# Altium PCB Battery_Mnitor1.PcbDoc
Units mil, origin at the board's own origin, x right, y up, seen from the top; angles counter-clockwise.
Board outline 1655 x 1765 mil, 2 copper layers (Top Layer, Bottom Layer); 22 components, 18 nets, 91 pads, 10 vias.
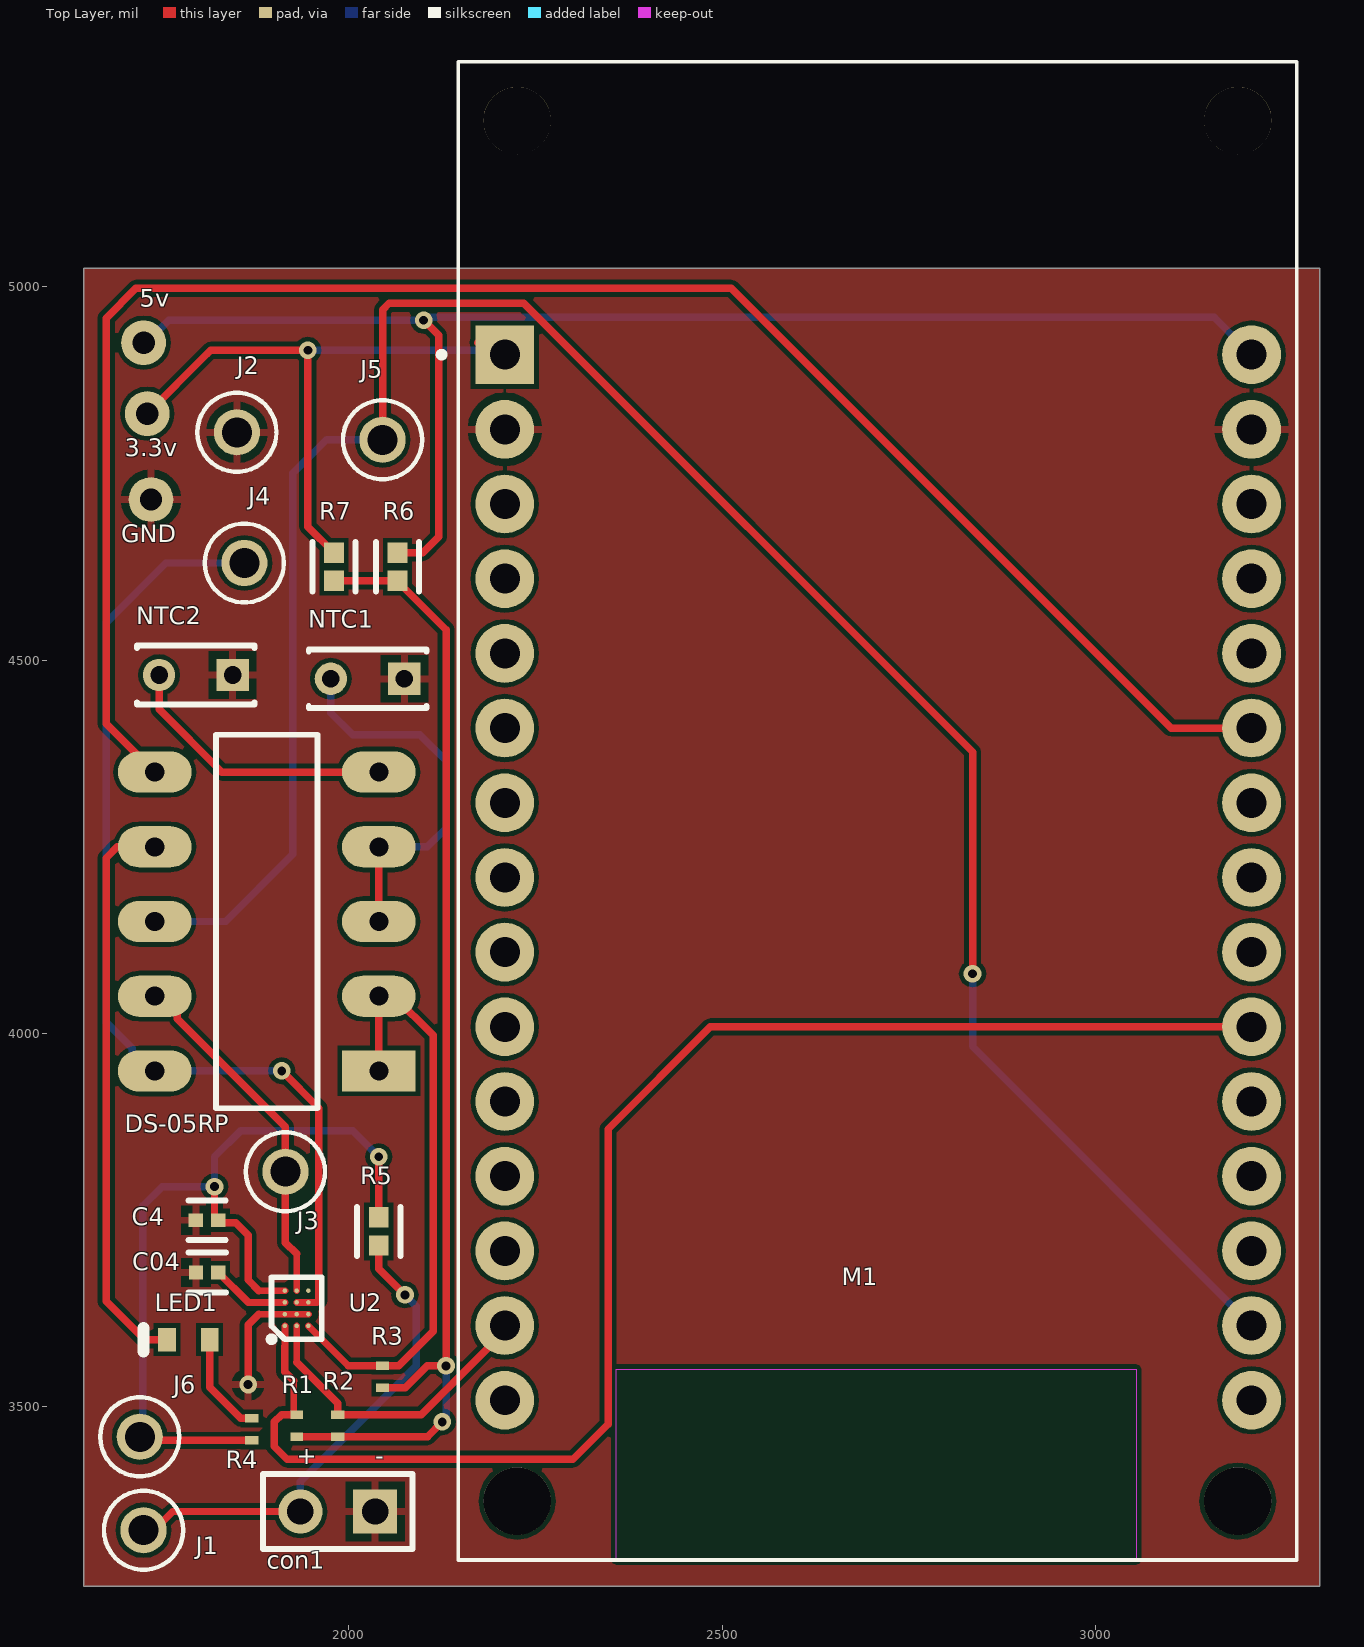
[diagram p0: Top Layer view]
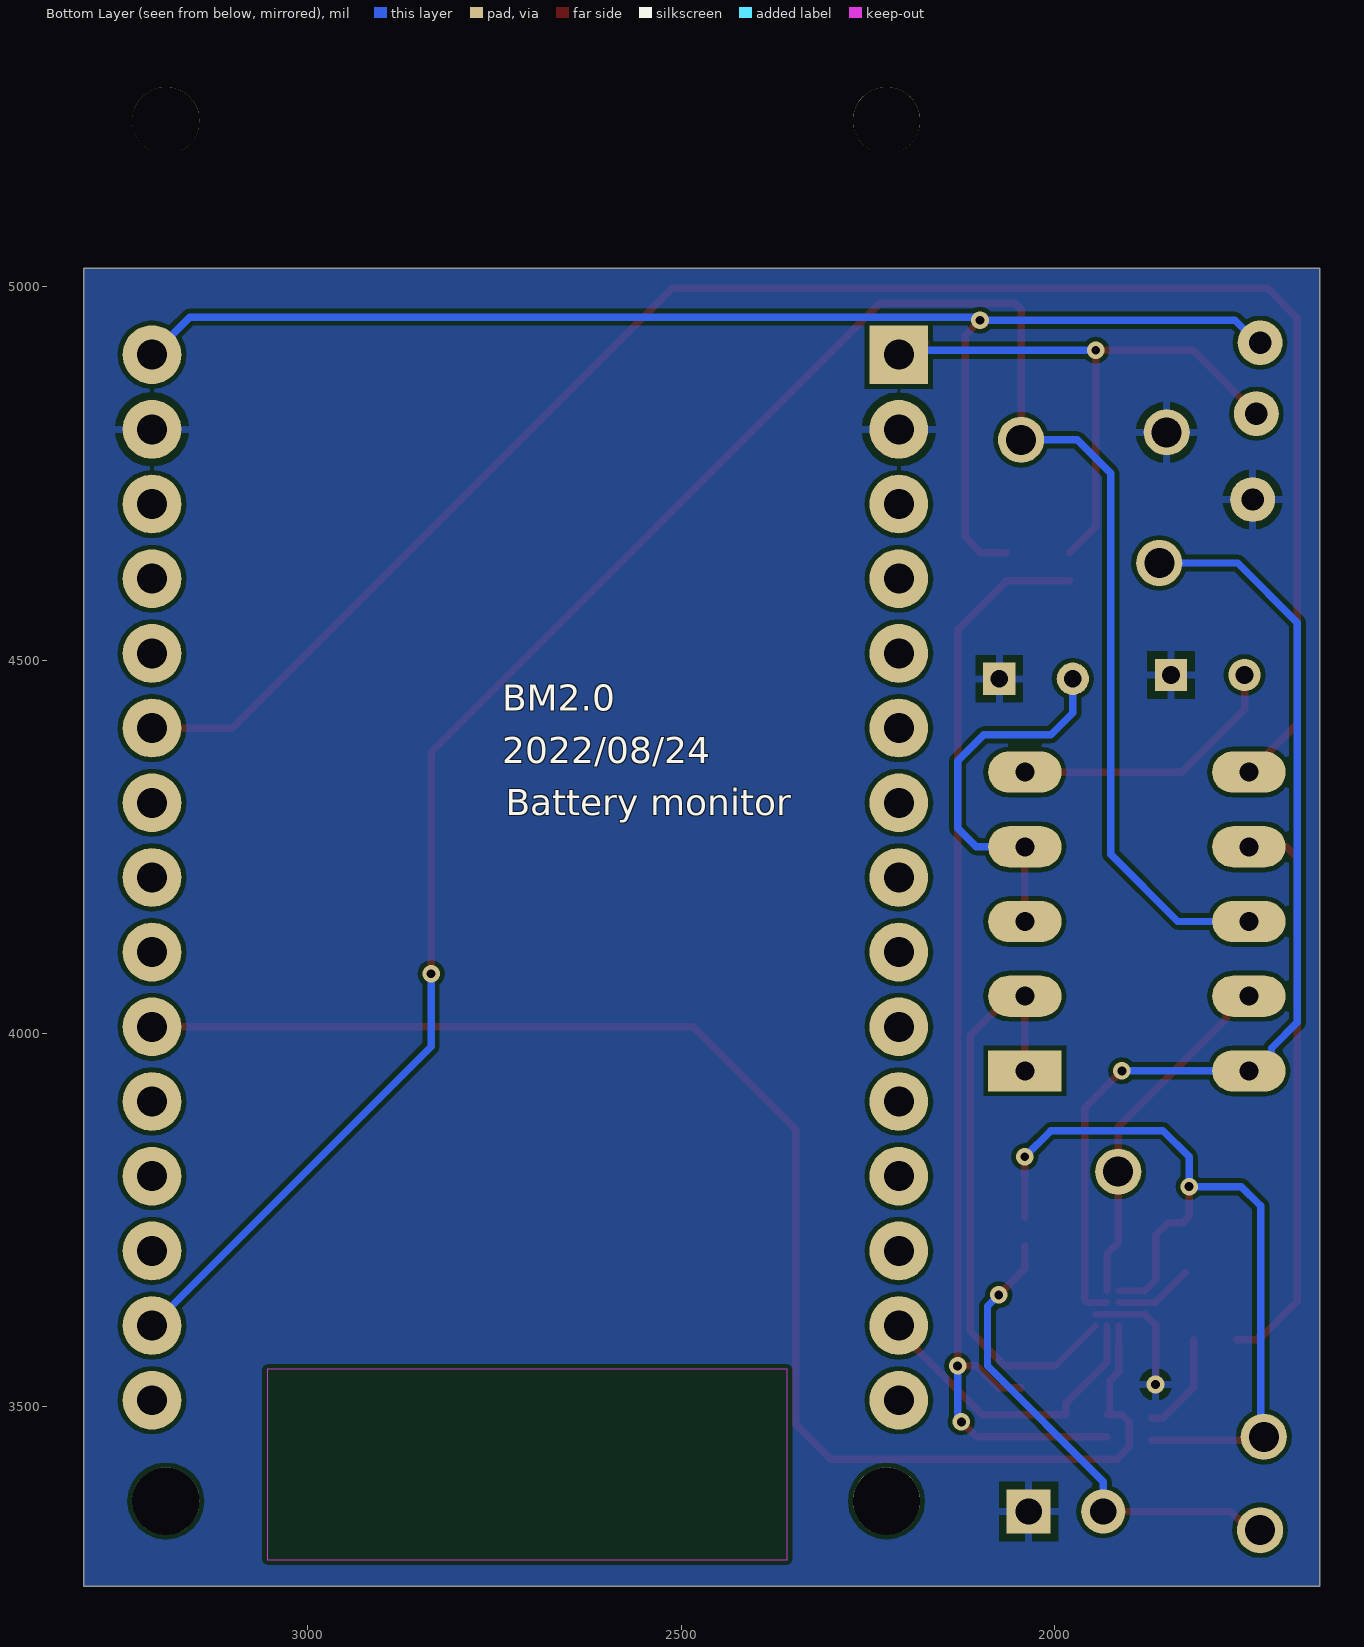
[diagram p1: Bottom Layer view, seen from below]
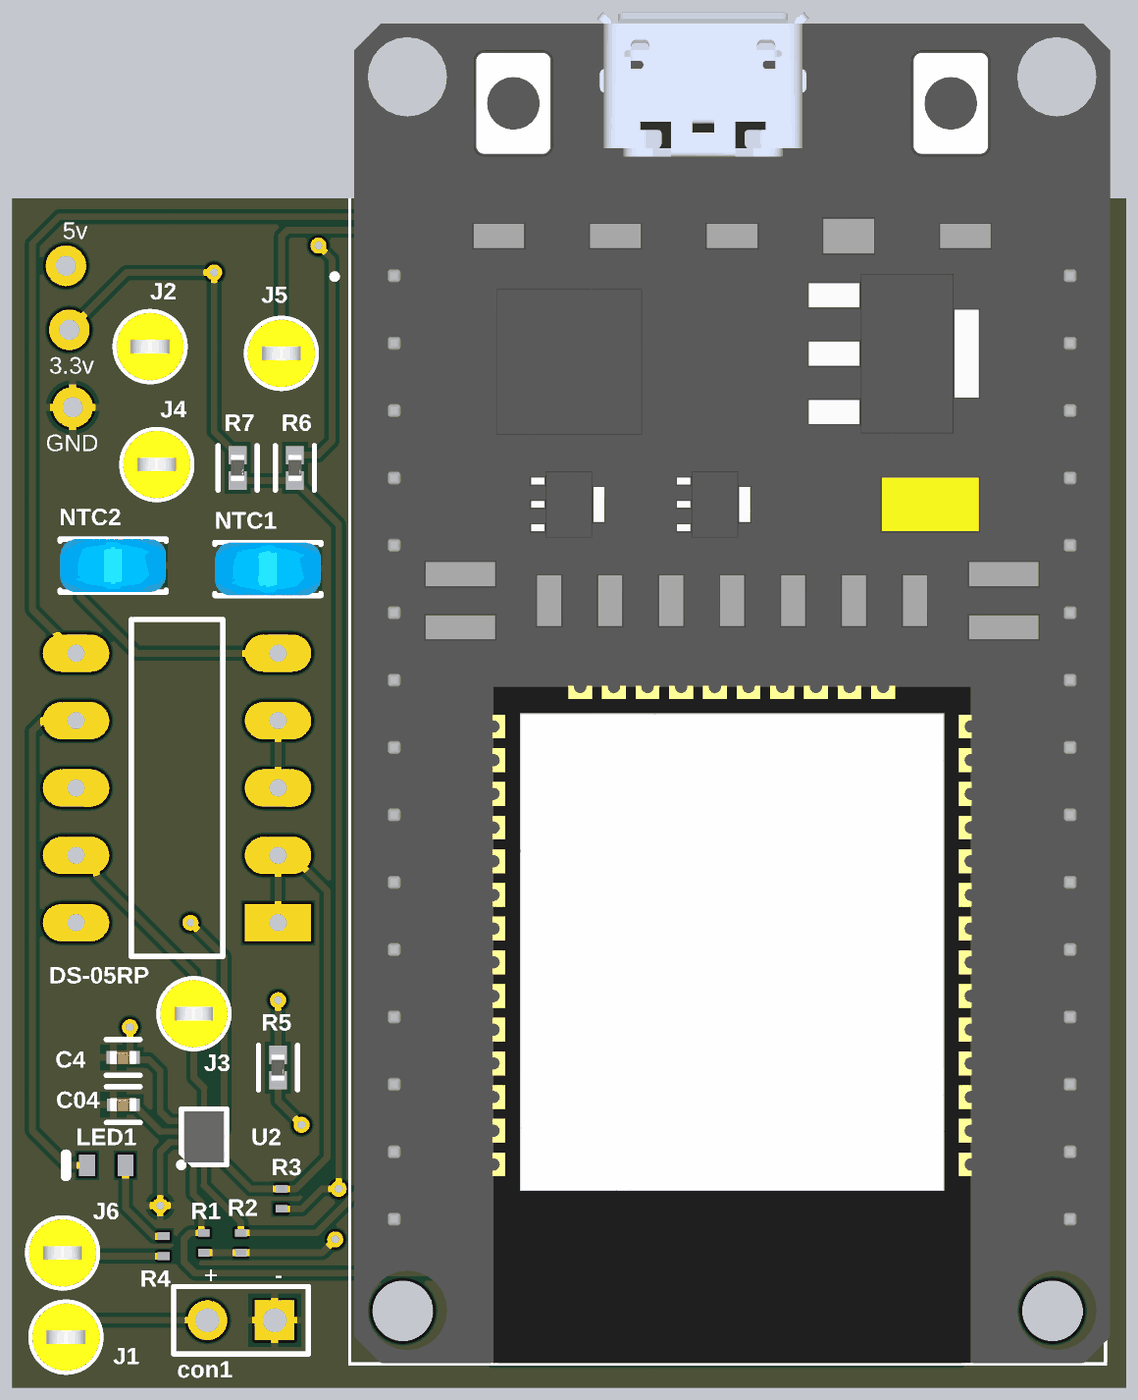
[diagram p2: 3D render of the assembled board from above, using the file's embedded part models]

## Layer stack, top to bottom
Top Solder: solder mask 0.4, Solder Resist, Dk 3.5
Top Layer: signal copper 1.4
Dielectric 1: dielectric 12.6, FR-4, Dk 4.8
Bottom Layer: signal copper 1.4
Bottom Solder: solder mask 0.4, Solder Resist, Dk 3.5

## Board outline
1645,3260 3300,3260 3300,5025 1645,5025

## Design rules (kind name [scope] priority, off if disabled: settings)
AssemblyTestpoint [All] p1: testpointundercomponent=TRUE minsize=40 maxsize=100 preferedsize=60 minholesize=0 maxholesize=40 preferedholesize=32.01 testpointgrid=1 usegrid=TRUE gridtolerance=0.01 allowsidetop=TRUE allowsidebottom=TRUE
Clearance [All] p1: gap=6 ignorepadtopadclearanceinfootprint=FALSE
MinimumSolderMaskSliver [All] p1: minsoldermaskwidth=0.98
PolygonConnect [All] p1: connectstyle=Relief reliefconductorwidth=10 reliefentries=4 polygonreliefangle="90 Angle" airgapwidth=10
RoutingVias [All] p1: holewidth=11.81 width=23.62 viastyle="Through Hole" minholewidth=11.81 minwidth=23.62 maxholewidth=11.81 maxwidth=23.62
SilkToSilkClearance [All] p1: silktosilkclearance=0.98
SilkToSolderMaskClearance [IsPad] p1: minsilkscreentomaskgap=5 clearancetoexposedcopper=TRUE
SolderMaskExpansion [All] p1: expansion=4
Width [All] p1: maxlimit=12.01 minlimit=6 preferedwidth=10
26 further rules are at their usual default settings.

## Components (designator, comment, footprint, x,y, rotation, side; value= is the part's Value field where it differs from the comment)
C4 "1uF" FP-CL542-IPC_C 1810,3750 r180 top
C04 "2.2uF" FP-CL826-IPC_C 1810.1,3680 r180 top
con1 "2pin Wire Connector_1" HDR1X2 2035,3360 r180 top
DS-05RP "Dip Switch" DIP10 2040,3950 r180 top
J1 "5004" FP-5004-MFG 1725,3335 r0 top
J2 "5004" FP-5004-MFG 1850,4805 r0 top
J3 "5004" FP-5004-MFG 1915,3815 r0 top
J4 "5004" FP-5004-MFG 1860,4630 r0 top
J5 "5004" FP-5004-MFG 2045,4795 r0 top
J6 "5004" FP-5004-MFG 1720,3460 r0 top
LED1 "Red" VISH-TLMX1100_V 1785,3590 r180 top
M1 "ESP32-WROOM-32" ESP32-DEVKIT-V1 2685,4305 r0 top
NTC1 "NXRT15XH103FA1B030" FP-NXR_151B030-MFG 2025,4475 r180 top
NTC2 "NXRT15XH103FA1B030" FP-NXR_151B030-MFG 1795,4480 r180 top
R1 "10K" RESC1005X40X25LL05T10#1 1930,3475 r90 top
R2 "10K" RESC1005X40X25LL05T10#2 1985,3475 r90 top
R3 "10K" RESC1005X40X25LL05T10#2 2045,3540.24 r90 top
R4 "1K" RESC1005X40X25LL05T10#2 1870,3470 r270 top
R5 "0R" FP-RC0402-0_4-IPC_A 2040,3735 r270 top
R6 "0R" FP-RC0402-0_4-IPC_A 2065,4625 r270 top
R7 "0R" FP-RC0402-0_4-IPC_A 1980,4625 r270 top
U2 "LC709204FXE-01TBG" BGA12C40P4X3_191X148X51 1930,3632.13 r90 top

## Footprints (in the part's own frame and the unit in brackets; to place one, negate y for a bottom-side part, rotate by r counter-clockwise, add the part's x,y. Pads: shape width x height; smd on the part's side, far side on the other; paste and mask are expansions set on the pad)
BGA12C40P4X3_191X148X51 [mil]
  round 6 smd: A1(-23.62,15.75) A2(-7.87,15.75) A3(7.87,15.75) A4(23.62,15.75) B1(-23.62,0) B2(-7.87,0) B3(7.87,0) B4(23.62,0) C1(-23.62,-15.75) C2(-7.87,-15.75) C3(7.87,-15.75) C4(23.62,-15.75)
  silkscreen extent -45,-34 41,38, body extent -38,-29 38,29, height 20
DIP10 [mm]
  rect 2.5x1.4 hole 0.65: 1(0,0)
  oval 2.5x1.4 hole 0.65: 2(0,-2.54) 3(0,-5.08) 4(0,-7.62) 5(0,-10.16) 6(7.62,-10.16) 7(7.62,-7.62) 8(7.62,-5.08) 9(7.62,-2.54) 10(7.62,0)
  silkscreen extent 2.08,-11.43 5.54,1.27
ESP32-DEVKIT-V1 [mm]
  rect 2x2 hole 1.02: 1(-12.098,15.341)
  round 2 hole 1.02: 2(-12.098,12.801) 3(-12.098,10.261) 4(-12.098,7.721) 5(-12.098,5.181) 6(-12.098,2.641) 7(-12.098,0.101) 8(-12.098,-2.439) 9(-12.098,-4.979) 10(-12.098,-7.519) 11(-12.098,-10.059) 12(-12.098,-12.599) 13(-12.098,-15.139) 14(-12.098,-17.679) 15(-12.098,-20.219) 16(13.302,-20.219) 17(13.302,-17.679) 18(13.302,-15.139) 19(13.302,-12.599) 20(13.302,-10.059) 21(13.302,-7.519) 22(13.302,-4.979) 23(13.302,-2.439) 24(13.302,0.101) 25(13.302,2.641) 26(13.302,5.181) 27(13.302,7.721) 28(13.302,10.261) 29(13.302,12.801) 30(13.302,15.341)
  round 2.289 hole 2.289 unplated: ""(-11.678,-23.649) ""(-11.678,23.301) ""(12.832,-23.649) ""(12.832,23.301)
  Keep-Out Layer region: 9.382,-25.649 -8.308,-25.649 -8.308,-19.159 9.382,-19.159
  Keep-Out Layer region: 9.382,-25.649 -8.308,-25.649 -8.308,-19.159 9.382,-19.159
  Keep-Out Layer region: 9.382,-25.649 -8.308,-25.649 -8.308,-19.159 9.382,-19.159
  silkscreen extent -14.35,-25.65 14.83,25.3, body extent -13.5,-25.63 15,25.3, height 7.2
FP-5004-MFG [mm]
  round 1.57 hole 1.02 paste-1000 mask+0: 1(0,0)
  silkscreen extent -1.35,-1.34 1.35,1.34, body extent -1.45,-1.45 1.45,1.45, height 0.25
FP-CL542-IPC_C [mil]
  rect 19.29x18.6 smd paste+0 mask+0: 1(-14.9,0) 2(14.9,0)
  silkscreen extent -25,-27 25,27, body extent -29,-15 29,15, height 10
FP-CL826-IPC_C [mil]
  rect 19.29x18.6 smd paste+0 mask+0: 1(-14.9,0) 2(14.9,0)
  silkscreen extent -25,-27 25,27, body extent -29,-15 29,15, height 10
FP-NXR_151B030-MFG [mm]
  rect 1.1x1.1 hole 0.6 paste-1000 mask+0: 1(-1.25,0)
  round 1.1 hole 0.6 paste-1000 mask+0: 2(1.25,0)
  silkscreen extent -2,-1 2,1, body extent -2.1,-1.1 2.1,1.1, height 0.25
FP-RC0402-0_4-IPC_A [mil]
  rect 27.16x26.48 smd paste+0 mask+0: 1(-18.84,0) 2(18.84,0)
  silkscreen extent -33,-29 33,29, body extent -41,-21 41,21, height 10
HDR1X2 [mm] "Connector; Header; 2 Position"
  rect 1.5x1.5 hole 0.9: 1(0,0)
  round 1.5 hole 0.9: 2(2.54,0)
  silkscreen extent -1.27,-1.27 3.81,1.27
RESC1005X40X25LL05T10#1 [mil] "Chip Resistor, 2-Leads, Body 1.00x0.50mm, IPC High Density"
  rect 11.5x16.72 smd: 1(-14.76,0) 2(14.76,0)
  body extent -21,-11 21,11, height 16
RESC1005X40X25LL05T10#2 [mil] "Chip Resistor, 2-Leads, Body 1.00x0.50mm, IPC High Density"
  rect 11.5x17.72 smd: 1(-14.76,0) 2(14.76,0)
  body extent -21,-11 21,11, height 16
VISH-TLMX1100_V [mm] "SMD, 2-Leads, Body 1.6x0.8mm"
  rect 0.6x0.8 smd: 1(-0.725,0) 2(0.725,0)
  silkscreen extent 1.53,-0.4 1.53,0.4, body extent -0.8,-0.4 0.8,0.4, height 0.65

## Part data
C4: library part CMP-13271-001051-1, "Cap Ceramic 1uF 25V X5R ±10% SMD 0402 +85°C Paper T/R", LCSC Part #=C52923, Manufacturer="Samsung Electro-Mechanics", Mfr. Part #=CL05A105KA5NQNC, Package=0402, Tolerance=10%, Voltage Rating=25V, Capacitance=1uF
C04: library part CMP-13271-001859-1, "Cap Ceramic 2.2uF 25V X5R ±20% SMD 0402 +85°C Paper T/R", Case Code (Imperial)=0402, Case Code (Metric)=1005, LCSC Part #=C159814, Manufacturer="Samsung Electro-Mechanics", Max Operating Temperature=85°C, Mfr. Part #=CL05A225MA5NUNC, Min Operating Temperature=-55°C, Tolerance=20%, Voltage=25V, Capacitance=2.2uF, Lead Free="Lead Free", Length=0.039inch, Mount="Surface Mount", Package=0402, Packaging="Cut Tape", Thickness=0.022inch, Width=0.02inch
con1: library part "Header 2H", "Header, 2-Pin, Right Angle", LatestRevisionDate=17-Jul-2002, LatestRevisionNote="Re-released for DXP Platform.", Publisher="Altium Limited"
DS-05RP: library part Component_1, "SPST 24V 25mA Red -20?~+70? 3000 Flat dial, raised type 2.54mm 6 Plugin DIP Switches ROHS", LCSC Part #=C129061, Manufacturer="Korean Hroparts Elec", Mfr. Part #=DS-05RP, Package=Plugin
J1 J2 J3 J4 J5 J6: library part CMP-2000-05575-2, "PC TEST POINT MINIATURE YELLOW", LCSC Part #=C2906762, Manufacturer=Keystone, Automotive=No, Category=Conn, ComponentLink2Description=Datasheet, ComponentLink2URL=https://www.keyelco.com/product-pdf.cfm?p=1313, Contact Material=Silver, Device Class L1=Connectors, Device Class L2=unset, Device Class L3=unset, Digikey Description="PC TEST POINT MINIATURE YELLOW", Height=4.72mm, Is Female=yes, Lead Free=Yes, Mfr. Part #=5004, Mouser Description="TEST POINT PC MINI .040\"D YELLOW", Number Of Contacts=1, Octopart=https://octopart.com/5004-keystone-28591, Package=5004, RoHS=TRUE
LED1: library part CMP-1666-00027-1, "LED, RED, 2.1 V, -40 to 100 degC, 2-Pin SMD (0603), RoHS, Tape and Reel", Capacitance="12 pF", LCSC Part #=C266784, Manufacturer=Vishay, Mfr. Part #=TLMS1100-GS08, Package=0603, Tolerance=5%, Type (Capacitors)=C0G, Voltage Rating="50 V", Color=Red, ComponentLink1Description="Manufacturer URL", ComponentLink1URL=http://www.vishay.com/, ComponentLink2Description=Datasheet, ComponentLink2URL=http://www.vishay.com/docs/83173/tlmb1100.pdf, DatasheetVersion="Rev. 2.7, 03/2016", Height="0.8 mm", Length="1.6 mm", PackageDescription="2-Pin Surface Mount Device, Body 1.6 x 0.8 mm", Radiation Hardening=No, Voltage Rating (DC)="50 V", Width="0.8 mm"
M1: library part ESP32-DEVKIT-V1, "Dual core, Wi-Fi: 2.4 GHz up to 150 Mbits/s,BLE (Bluetooth Low Energy) and legacy Bluetooth, 32 bits, Up to 240 MHz"
NTC1 NTC2: library part CMP-06022-001050-1, "Thermistor NTC 10kO ±1% 2-Pin Radial Bulk", LCSC Part #=C152559, Manufacturer="Murata Electronics", Max Operating Temperature=125°C, Max Power Dissipation=7.5mW, Min Operating Temperature=-40°C, Package="Radial Leaded", Package Quantity=500, Resistance=10kR, Resistance Tolerance=1%, Height=2mm, Lead Diameter=0.4mm, Lead Free="Lead Free", Lead Pitch=2.5mm, Length=5mm, Mfr. Part #=NXRT15XH103FA1B030, Mount="Through Hole", Number of Pins=2, Packaging=Bulk, Power Rating=7.5mW, RoHS Compliant=Yes, Series=NXR, Termination=Radial, Tolerance=1%, Width=4mm
R1 R2 R3: library part CMP-2002-07353-1, "62.5mW Thick Film Resistors 50V ±100ppm/? ±1% -55?~+155? 10kO 0402 Chip Resistor - Surface Mount ROHS", LCSC Part #=C60490, Manufacturer="Yageo / Phycomp", Mfr. Part #=RC0402FR-0710KL, Package=0402, Power=1/16W, Tolerance=±1%, Resistance=10K
R4: library part CMP-2002-07941-1, "62.5mW 50V ±100ppm/? ±5% -55?~+155? 1kO 0402 Chip Resistor - Surface Mount ROHS", LCSC Part #=C105637, Manufacturer="Yageo / Phycomp", Mfr. Part #=RC0402JR-071KL, Package=0402, Resistance=1K
R5 R6 R7: library part CMP-2002-07342-2, "RES SMD 0 OHM JUMPER 1/16W 0402", LCSC Part #=C106231, Manufacturer=YAGEO, Max Operating Temperature=155°C, Mfr. Part #=RC0402FR-070RL, Package=0402, Power Rating=62.5mW, Resistor Type="Thick Film", Temperature Coefficient=200ppm/°C, Tolerance=1%, Voltage Rating=50V, Lead Free="Lead Free", Mount="Surface Mount", Number of Terminations=2, Packaging="Tape and Reel", Radiation Hardening=No, Resistance=0R, RoHS Compliant=Yes, Series=RC, Size Code=0402, Termination=SMD/SMT, Width=0.5mm
U2: "Battery Management FUEL GAUGE", LCSC Part #=C895466, Manufacturer=onsemi, Mouser Part Number=863-LC709204FXE01TBG, Package=WLCSP12(1.48x1.91x0.51), Datasheet Link=https://datasheet.datasheetarchive.com/originals/distributors/Datasheets_SAMA/fe717287e81a719257576d7f98eba387.pdf, Geometry.Height=0.51mm, Mfr. Part #=LC709204FXE-01TBG, Mouser Price/Stock=https://www.mouser.co.uk/ProductDetail/onsemi/LC709204FXE-01TBG?qs=xZ%2FP%252Ba9zWqZEcFBJqR18FQ%3D%3D

## Free pads (board coordinates)
  round 60 hole 30: 19(1730,4830) 20(1725,4925) 21(1735,4715)

## Via types
v1: diameter 23.62, hole 11.81, Top Layer to Bottom Layer, 10 vias

## Nets (pads, with @x,y where several pads share a name; then routed paths per layer and width w, separated by ;. In a path a pad name is that pad's centre, name@x,y a point inside that pad or via, vN(x,y) a via of type N, cw(c..) or ccw(c..) an arc to the next point about the centre after c; other vN are vias at no path point)
BM_ALARM: DS-05RP.6 M1.25 | length 2429
  Top Layer w10: DS-05RP.6 1675,4415 1675,4957.98 1714.83,4997.81 2512.19,4997.81 3101.02,4408.98 M1.25
BM_ALARM2: DS-05RP.7 LED1.2 | length 771.5
  Top Layer w10: 1726.46,3593.94 1726.46,3590 ; DS-05RP.7 1690,4250 1675,4235 1675,3641.46 1726.46,3590 ; LED1.2 1726.46,3590
CurMpoint1: con1.2 J1.1 R5.2 | length 656.4
  Top Layer w10: J1.1 1739.02,3335 1764.02,3360 con1.2 ; R5.2 2040,3685 v1(2075,3650)
  Bottom Layer w10: con1.2@1935,3365 1935,3400 2090,3555 2090,3635 v1(2075,3650)
CurMpoint2: C4.1 J6.1 R4.2 R5.1 U2.A4 | length 1150.6
  Top Layer w9: 1879.25,3655.75 U2.A4
  Top Layer w10: J6.1 1724.76,3455.24 R4.2 ; v1(1820,3795) 1820,3755.25 1825.25,3750 C4.1 1828.16,3746.75 1848.25,3746.75 1865,3730 1865,3670 1879.25,3655.75 ; R5.1 v1(2040,3835)
  Bottom Layer w10: J6.1 1724.09,3464.09 1724.09,3769.09 1750,3795 v1(1820,3795) 1820,3835 1855,3870 2005,3870 v1(2040,3835)
GND: C4.2 C04.2 con1.1 J2.1 M1.2 M1.29 NTC1.1 NTC2.1 pad.21 U2.A2 U2.B2 U2.C2 | length 167.8
  Top Layer w9: 1879.25,3624.25 U2.A2 U2.B2 U2.C2
  Top Layer w10: v1(1865,3530) 1865,3610 1879.25,3624.25
  Bottom Layer w10: NTC2.1 NTC2.1@1845,4480.79
NetC04_1: C04.1 U2.A3 | length 105.8
  Top Layer w9: 1865,3640 U2.A3
  Top Layer w10: C04.1 1865,3640
NetDS-05RP_1: DS-05RP.1 DS-05RP.2 R3.2 U2.C1 | length 799.2
  Top Layer w9: U2.C1 1999.25,3555
  Top Layer w10: 1999.25,3555 R3.2 2066.68,3555 2112.81,3601.13 2112.81,3997.44 2060.25,4050 DS-05RP.2 DS-05RP.1
NetDS-05RP_3: DS-05RP.3 DS-05RP.4 NTC1.2 | length 528.4
  Top Layer w10: NTC1.2@1974.79,4474 NTC1.2 ; DS-05RP.4@2030,4250 DS-05RP.4 DS-05RP.3
  Bottom Layer w10: NTC1.2 1975.79,4429.21 2005,4400 2095,4400 2130,4365 2130,4275 2105,4250 DS-05RP.4
NetDS-05RP_5: DS-05RP.5 NTC2.2 | length 374.9
  Top Layer w10: NTC2.2 1745.79,4434.21 1830,4350 DS-05RP.5
NetLED1_1: LED1.1 R4.1 | length 137.3
  Top Layer w10: LED1.1 1813.54,3526.46 1855.24,3484.76 R4.1
NetM1_1: M1.1 pad.19 R7.1 | length 838.9
  Top Layer w10: pad.19 1810,4910 1815,4915 v1(1945,4915) 1945,4678.84 R7.1 ; M1.1@2172.68,4925 M1.1@2198.7,4898.98
  Bottom Layer w10: v1(1945,4915) 2202.68,4915 M1.1
NetM1_30: M1.30 pad.20 R6.1 | length 1880.9
  Top Layer w10: R6.1 2098.89,4643.84 2120,4664.95 2120,4935 v1(2100,4955)
  Bottom Layer w10: pad.20 1728.64,4925 1758.64,4955 v1(2100,4955) 2104.35,4959.35 3158.33,4959.35 M1.30
NetR1_1: R1.1 R2.1 R3.1 R6.2 R7.2 | length 1540.7
  Top Layer w10: R1.1 R2.1 2105.24,3460.24 v1(2125,3480) ; R7.2 R6.2 2065,4605.82 2130,4540.82 v1(2130,3555) 2105,3555 2075.47,3525.47 R3.1 R3.1@2045.12,3525.35
  Bottom Layer w10: v1(2125,3480) 2130,3485 v1(2130,3555)
NTCvp: DS-05RP.8 J5.1 M1.17 | length 3013.9
  Top Layer w10: J5.1 2045,4969.14 2053.67,4977.81 2234.16,4977.81 2835,4376.97 v1(2835,4080) ; J5.1@2055,4785 J5.1@2057.5,4782.5
  Bottom Layer w10: DS-05RP.8 1835,4150 1925,4240 1925,4750 1970,4795 J5.1 ; v1(2835,4080) 2835,3982.68 M1.17
SCL: M1.14 R2.2 U2.B1 | length 431.5
  Top Layer w9: 1930,3560 U2.B1
  Top Layer w10: 1930,3560 1985,3505 R2.2 2097.02,3489.76 2208.7,3601.44 M1.14 M1.14@2199.87,3617.81
SDA: M1.21 R1.2 U2.A1 | length 1978.3
  Top Layer w9: 1914.25,3581.06 U2.A1 ; 1926.14,3535 1926.14,3491.01 1927.39,3489.76 R1.2
  Top Layer w10: 1914.25,3581.06 1914,3580.81 1914,3547.14 1926.14,3535 ; R1.2@1927.39,3489.76 1909.76,3489.76 1900,3480 1900,3447.08 1917.08,3430 2300,3430 2346.91,3476.91 2346.91,3871.91 2483.98,4008.98 M1.21
TSENSE1: DS-05RP.9 J3.1 U2.B4 | length 488.5
  Top Layer w9: U2.B4 1930,3705
  Top Layer w10: DS-05RP.9 1749.44,4050 1770.29,4029.16 1770.29,4019.71 1915,3875 J3.1 1915,3720 1930,3705
  Bottom Layer w10: DS-05RP.9@1758.74,4031.26 DS-05RP.9@1768.74,4031.26
TSENSE2: DS-05RP.10 J4.1 U2.B3 U2.C3 | length 1379.4
  Top Layer w9: U2.B3 U2.C3 1957.06,3640
  Top Layer w10: v1(1910,3950) 1959.75,3900.25 1959.75,3642.69 1957.06,3640
  Bottom Layer w10: J4.1 1755,4630 1675,4550 1675,4015 1709.71,3980.29 1709.71,3970.84 1730.56,3950 DS-05RP.10 v1(1910,3950)
pads on no net: M1. M1.3 M1.4 M1.5 M1.6 M1.7 M1.8 M1.9 M1.10 M1.11 M1.12 M1.13 M1.15 M1.16 M1.18 M1.19 M1.20 M1.22 M1.23 M1.24 M1.26 M1.27 M1.28 U2.C4

## Polygon pours and split planes (outlines as drawn)
GND on Bottom Layer "GND_L02_P012" (solid, pour order 12): 1645,3260 3300,3260 3300,5025 1645,5025
GND on Top Layer "GND_L01_P013" (solid, pour order 13): 1645,3260 3300,3260 3300,5025 1645,5025

## Silkscreen, mask and mechanical layers (free items; w line width, h text height)
Top Overlay:
  text "5v" at 1720,4965 h40
  text "3.3v" at 1700,4765 h40
  text "GND" at 1695,4650 h40
  text "+" at 1930,3415 h40
  text "-" at 2035,3415 h40
Bottom Overlay:
  text "BM2.0" at 2740,4420 h60
  text "2022/08/24" at 2740,4350 h60
  text "Battery monitor" at 2735,4280 h60
Mechanical 1:
  lines w10: 1650,3265 1650,5020 3300,5020 3300,3265 1650,3265